# Altium PCB sensor.PcbDoc
Units mm, origin at the board's own origin, x right, y up, seen from the top; angles counter-clockwise.
Board outline 119.38 x 26.29 mm, 2 copper layers (Top Layer, Bottom Layer); 25 components, 14 nets, 56 pads, 0 vias.
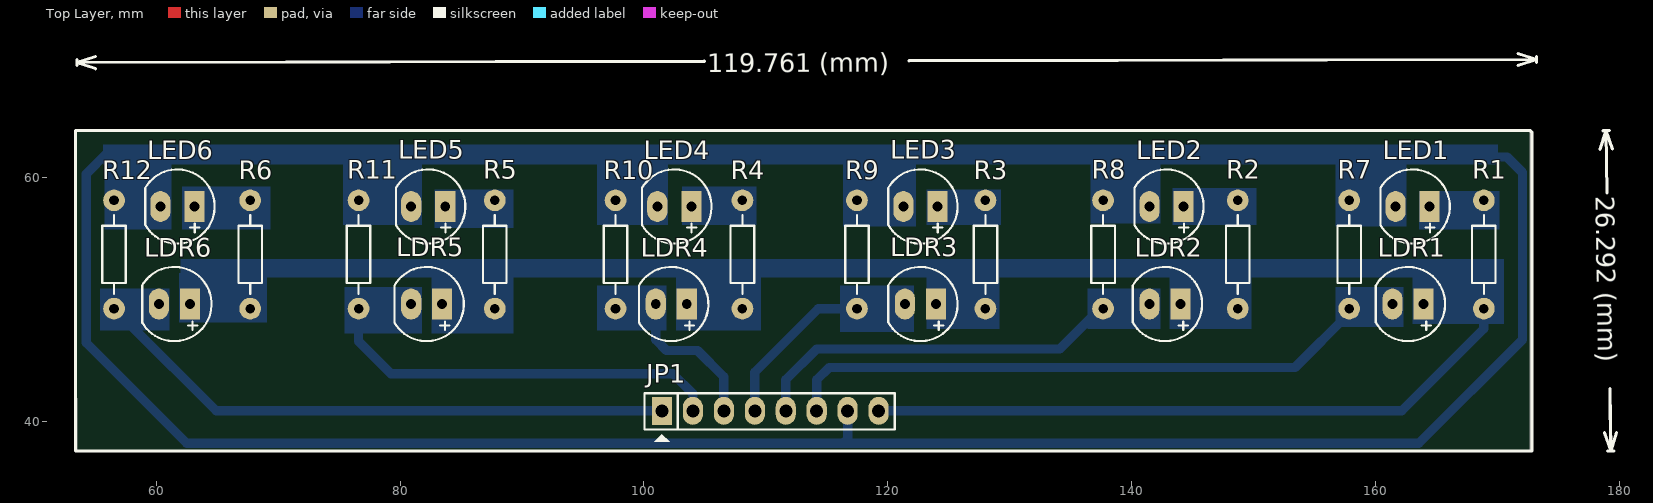
[diagram p0: Top Layer view]
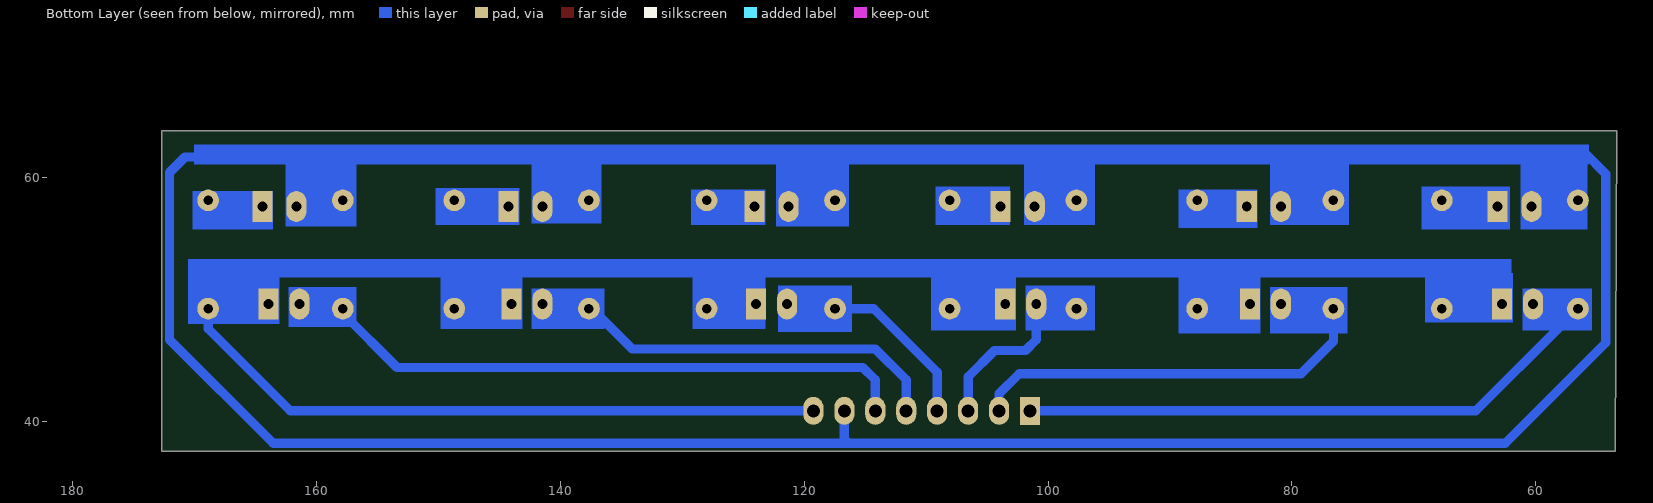
[diagram p1: Bottom Layer view, seen from below]
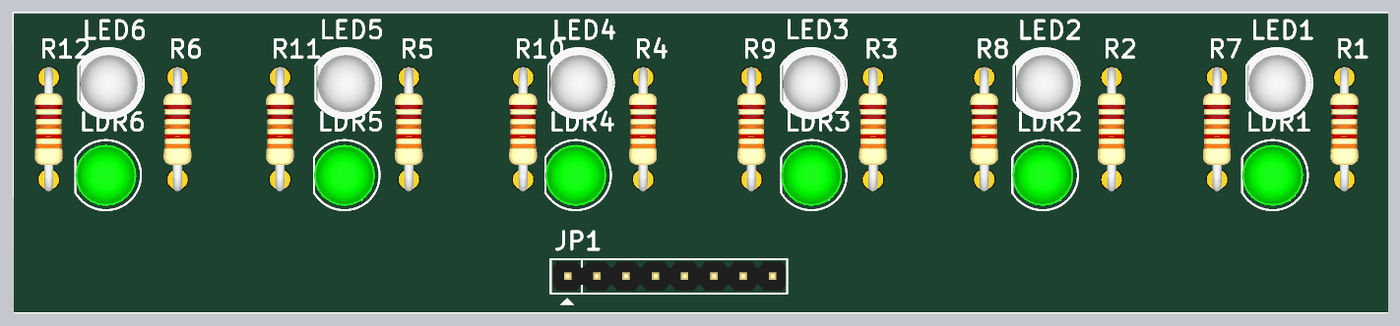
[diagram p2: 3D render of the assembled board from above, using the file's embedded part models]

## Layer stack, top to bottom
Top Layer: signal copper 0.0356
Dielectric: dielectric 0.32, FR-4, Dk 4.8
Bottom Layer: signal copper 0.0356

## Board outline
53.34,63.881 172.72,63.881 172.72,37.592 53.467,37.592

## Design rules (kind name [scope] priority, off if disabled: settings)
Clearance [All] p1: gap=0.508
PolygonConnect [All] p1: connectstyle=Relief reliefconductorwidth=0.254 reliefentries=4 polygonreliefangle="90 Angle"
RoutingCorners [All] p1: cornerstyle=45-Degree minsetback=0 maxsetback=0
RoutingLayers [All] p1: top layer_v5=FALSE bottom layer_v5=TRUE
RoutingVias [All] p1: holewidth=0.711 width=1.27 viastyle="Through Hole" minholewidth=0.711 minwidth=1.27 maxholewidth=0.711 maxwidth=1.27
SilkscreenOverComponentPads [All] p1: minsilkscreentomaskgap=0.254
SolderMaskExpansion [All] p1: expansion=0.102
Width [All] p1: maxlimit=1.016 minlimit=0.762 preferedwidth=0.762
25 further rules are at their usual default settings.

## Components (designator, comment, footprint, x,y, rotation, side; value= is the part's Value field where it differs from the comment)
JP1 "JP8 PIN" JP8 101.473,40.894 r0 top
LDR1 "LDR" "LED-5 GRe" 163.957,49.657 r180 top
LDR2 "LDR" "LED-5 GRe" 144.018,49.657 r180 top
LDR3 "LDR" "LED-5 GRe" 123.952,49.657 r180 top
LDR4 "LDR" "LED-5 GRe" 103.505,49.657 r180 top
LDR5 "LDR" "LED-5 GRe" 83.439,49.657 r180 top
LDR6 "LDR" "LED-5 GRe" 62.738,49.657 r180 top
LED1 "LED" LED-5TRED 163.068,57.658 r180 top
LED2 "LED" LED-5TRED 142.875,57.658 r180 top
LED3 "LED" LED-5TRED 122.682,57.658 r180 top
LED4 "LED" LED-5TRED 102.489,57.658 r180 top
LED5 "LED" LED-5TRED 82.296,57.658 r180 top
LED6 "LED" LED-5TRED 61.722,57.658 r180 top
R1 "220R" R1/4W 168.91,49.276 r90 top
R2 "220R" R1/4W 148.717,49.276 r90 top
R3 "220R" R1/4W 128.016,49.276 r90 top
R4 "220R" R1/4W 108.077,49.276 r90 top
R5 "220R" R1/4W 87.757,49.276 r90 top
R6 "220R" R1/4W 67.691,49.276 r90 top
R7 "10k" R1/4W 157.861,49.276 r90 top
R8 "10k" R1/4W 137.668,49.276 r90 top
R9 "10k" R1/4W 117.475,49.276 r90 top
R10 "10k" R1/4W 97.663,49.276 r90 top
R11 "10k" R1/4W 76.581,49.276 r90 top
R12 "10k" R1/4W 56.515,49.276 r90 top

## Footprints (in the part's own frame and the unit in brackets; to place one, negate y for a bottom-side part, rotate by r counter-clockwise, add the part's x,y. Pads: shape width x height; smd on the part's side, far side on the other; paste and mask are expansions set on the pad)
JP8 [mil] "JP8"
  rect 65x90 hole 42: 1(0,0)
  oval 65x90 hole 42: 2(100,0) 3(200,0) 4(300,0) 5(400,0) 6(500,0) 7(600,0) 8(700,0)
  silkscreen extent -56,-100 752,57, body extent -48,-50 748,48, height 323
"LED-5 GRe" [mil] "LED 2 PIN, 5 ly , Only colour,pin to pin 100mil"
  rect 65x100 hole 32: 1(0,0)
  oval 65x100 hole 32: 2(100,0)
  silkscreen extent -70,-120 154,120, body extent -54,-104 154,105, height 337
LED-5TRED [mil] "LED 2 PIN, 5 ly , Only colour, pin to pin 110mil"
  rect 65x100 hole 32: 1(-55,0)
  oval 65x100 hole 32: 2(55,0)
  silkscreen extent -120,-120 104,120, body extent -116,-117 98,120, height 339
R1/4W [mil] "R 1/4W, 2 Pin, 350mil"
  round 70 hole 31: 1(0,0) 2(350,0)
  silkscreen extent 48,-38 302,38, body extent -40,-47 386,47, height 111

## Part data
JP1: library part JP8
LDR1 LDR2 LDR3 LDR4 LDR5 LDR6: "Quang Tro"
LED1 LED2 LED3 LED4 LED5 LED6: "LED Single colour Green and Red"
R1 R2 R3 R4 R5 R6 R7 R8 R9 R10 R11 R12: library part R1/4W, "Resistor 1/4W"

## Nets (pads, with @x,y where several pads share a name; then routed paths per layer and width w, separated by ;. In a path a pad name is that pad's centre, name@x,y a point inside that pad or via, vN(x,y) a via of type N, cw(c..) or ccw(c..) an arc to the next point about the centre after c; other vN are vias at no path point)
CB1: JP1.6 LDR1.2 R7.1 | length 48.9
  Bottom Layer w0.762: JP1.6 114.173,43.434 115.189,44.45 153.416,44.45 157.861,48.895 R7.1
CB2: JP1.5 LDR2.2 R8.1 | length 31
  Bottom Layer w0.762: JP1.5 111.633,43.434 114.173,45.974 134.112,45.974 137.414,49.276 R8.1
CB3: JP1.4 LDR3.2 R9.1 | length 13.7
  Bottom Layer w0.762: JP1.4 109.093,44.069 114.3,49.276 R9.1
CB4: JP1.3 LDR4.2 R10.1 | length 12.6
  Bottom Layer w0.762: LDR4.2 100.965,46.736 101.854,45.847 104.394,45.847 106.553,43.688 JP1.3
CB5: JP1.2 LDR5.2 R11.1 | length 33.3
  Bottom Layer w0.762: R11.1 76.581,46.609 79.248,43.942 102.362,43.942 104.013,42.291 JP1.2
CB6: JP1.1 LDR6.2 R12.1 | length 46.5
  Bottom Layer w0.762: 57.912,47.879 64.897,40.894 JP1.1
GND: JP1.7 LED1.2 LED2.2 LED3.2 LED4.2 LED5.2 LED6.2 R7.2 R8.2 R9.2 R10.2 R11.2 R12.2 | length 160.9
  Bottom Layer w0.762: 56.007,62.103 54.229,60.325 54.229,46.482 62.484,38.227 116.332,38.227 ; JP1.7 116.713,38.608 116.332,38.227 ; 169.545,61.976 169.799,61.722 170.815,61.722 172.085,60.452 172.085,46.736 163.576,38.227 116.332,38.227
NetLED1_1: LED1.1 R1.2
NetLED2_1: LED2.1 R2.2
NetLED3_1: LED3.1 R3.2
NetLED4_1: LED4.1 R4.2
NetLED5_1: LED5.1 R5.2
NetLED6_1: LED6.1 R6.2
VCC: JP1.8 LDR1.1 LDR2.1 LDR3.1 LDR4.1 LDR5.1 LDR6.1 R1.1 R2.1 R3.1 R4.1 R5.1 R6.1 | length 54.1
  Bottom Layer w0.762: JP1.8 162.179,40.894 168.91,47.625 R1.1

## Other copper
Bottom Layer:
  rectangle net VCC: 82.55,47.244 89.281,51.943
  rectangle net VCC: 102.616,47.498 109.601,51.816
  rectangle net VCC: 123.19,47.625 129.159,52.07
  rectangle net VCC: 143.129,47.625 149.86,52.197
  rectangle net VCC: 163.068,48.006 170.561,53.086
  rectangle net VCC: 61.976,51.816 170.561,53.34
  rectangle net VCC: 61.849,48.133 69.088,52.197
  rectangle net GND: 156.718,56.007 162.56,61.341
  rectangle net GND: 136.652,56.261 142.367,61.214
  rectangle net GND: 116.332,56.007 122.301,61.341
  rectangle net GND: 96.139,56.134 101.981,61.595
  rectangle net GND: 75.311,56.134 81.788,61.595
  rectangle net GND: 55.626,61.087 170.053,62.738
  rectangle net GND: 55.753,55.753 61.214,61.976
  rectangle net CB1: 156.718,47.752 162.306,51.054
  rectangle net CB2: 136.398,47.625 142.367,50.927
  rectangle net CB3: 116.078,47.371 122.174,51.181
  rectangle net CB4: 96.139,47.498 101.854,51.181
  rectangle net CB5: 75.438,47.244 81.788,51.054
  rectangle net CB6: 55.372,47.498 61.087,50.927
  rectangle net NetLED6_1: 62.103,55.753 69.342,59.309
  rectangle net NetLED5_1: 82.804,55.88 89.281,59.055
  rectangle net NetLED4_1: 103.124,56.134 109.22,59.309
  rectangle net NetLED3_1: 123.19,56.134 129.286,59.055
  rectangle net NetLED1_1: 163.576,55.753 170.18,58.928
  rectangle net NetLED2_1: 143.383,56.134 150.241,59.182

## Silkscreen, mask and mechanical layers (free items; w line width, h text height)
Top Overlay:
  lines w0.254: 53.468,69.215 53.466,69.723 ; 54.99,69.98 53.467,69.469 ; 54.992,68.964 53.467,69.469 ; 104.943,69.578 53.467,69.469 ; 121.752,69.614 173.228,69.723 ; 171.703,70.228 173.228,69.723 ; 171.705,69.212 173.228,69.723 ; 173.229,69.469 173.227,69.977 ; 178.457,62.35 178.943,63.881 ; 178.689,63.877 179.197,63.885 ; 178.794,39.108 179.324,37.592 ; 179.017,58.76 178.943,63.881 ; 179.07,37.588 179.578,37.596 ; 179.25,42.713 179.324,37.592 ; 179.473,62.365 178.943,63.881 ; 179.81,39.123 179.324,37.592 ; 53.34,37.592 53.34,63.881 172.339,63.881 172.72,63.881 172.847,63.754 172.847,63.373 172.847,37.592 53.34,37.592
  text "119.761 (mm)" at 105.199,68.665 h1.52 r0.12
  text "26.292 (mm)" at 178.107,58.492 h1.52 r270.83